# EAGLE board powersource (EAGLE 9.2.2)

Size 95 x 72 mm. Coordinates in mm from the lower left corner, seen from the top.
Outline: 0,0 95,0 95,72 0,72 0,0
Copper layers (1*16): Top 0.035mm / dielectric 1.5mm / Bottom 0.035mm
Design rules "default": minimum track width 6mil, minimum drill 0.35mm, track to track 6mil, track to pad 6mil, pad to pad 6mil, via to via 6mil, smd to smd 6mil, copper to edge 40mil, drill to drill 6mil, minimum pad ring 10mil, minimum via ring 8mil, stop-mask expansion 4mil, vias tented up to drill 0mil, thermal gap 10mil
Holes 3.2 mm at 3,3 92,3 3,69 92,69

## Footprints (pad centres in the part's own frame; a part is rotated, then mirrored left to right if it is on the bottom)
E7,5-16 = drill 1.016 pad 3.15: + -3.81,0 | drill 1.016 pad 3.15 octagon: - 3.81,0
E7,5-18 = drill 1.016 pad 3.15: + -3.81,0 | drill 1.016 pad 3.15 octagon: - 3.81,0
1X03 = drill 1.016 long: 1 -2.54,0; 2 0,0; 3 2.54,0
1X02 = drill 1.016 long: 1 -1.27,0; 2 1.27,0
DO07 = drill 0.813 long: A 5.08,0; C -5.08,0
BRIDGERECTIFIER = drill 1.016 pad 2.54: + 12.5,12.5; - 3,3; AC1 3,12.5; AC2 12.5,3
RESISTOR = drill 1.016 pad 2.54 octagon: 1 0,0; 2 73.66,0

## Placement (x,y rotation side)
C1  E7.5-16  [E7,5-16]  37,22 90 top
C2  E7.5-18  [E7,5-18]  73,22 90 top
C3  E7.5-18  [E7,5-18]  74,58 90 top
JP1  [1X03]  7,19 90 top
JP2  [1X02]  89,14 90 top
JP3  [1X02]  7,57 90 top
JP4  [1X02]  89,58 90 top
L1  DIODE  [DO07]  19,30 180 top
L2  DIODE  [DO07]  20,19 180 top
U$6  BRIDGERECTIFIER  [BRIDGERECTIFIER]  30,50 0 top
U$7  RESISTOR  [RESISTOR]  16,7 0 top

## Library data of the parts
C1-C3 JP1-JP4 L1 L2 U$6 U$7 = VacuumTube

## Nets
GND: C1.- C2.- C3.- JP1.1 JP2.2 JP4.2 U$6.AC2
N$1: JP1.2 L2.A
N$2: JP1.3 L1.A
N$3: JP3.2 U$6.-
N$4: JP3.1 U$6.+
N$7: C3.+ JP4.1 U$6.AC1
N$14: C2.+ JP2.1 U$7.2
N$15: C1.+ L1.C L2.C U$7.1

## Tracks (layer width: path | path; a pad name or v marks a point on that pad's centre or on a via)
GND  (6 unrouted)
N$1  (1 unrouted)
N$2  (1 unrouted)
N$3  (1 unrouted)
N$4  (1 unrouted)
N$7  (2 unrouted)
N$14  (2 unrouted)
N$15  (3 unrouted)